# Altium PCB MKIPRIMARY 4L.PcbDoc
Units mm, origin at the board's own origin, x right, y up, seen from the top; angles counter-clockwise.
Board outline 61 x 34.4 mm, 4 copper layers (Top Layer, Int1, Int2, Bottom Layer), stack 1.586 mm thick; 3 components, 1 nets, 16 pads, 51 vias.
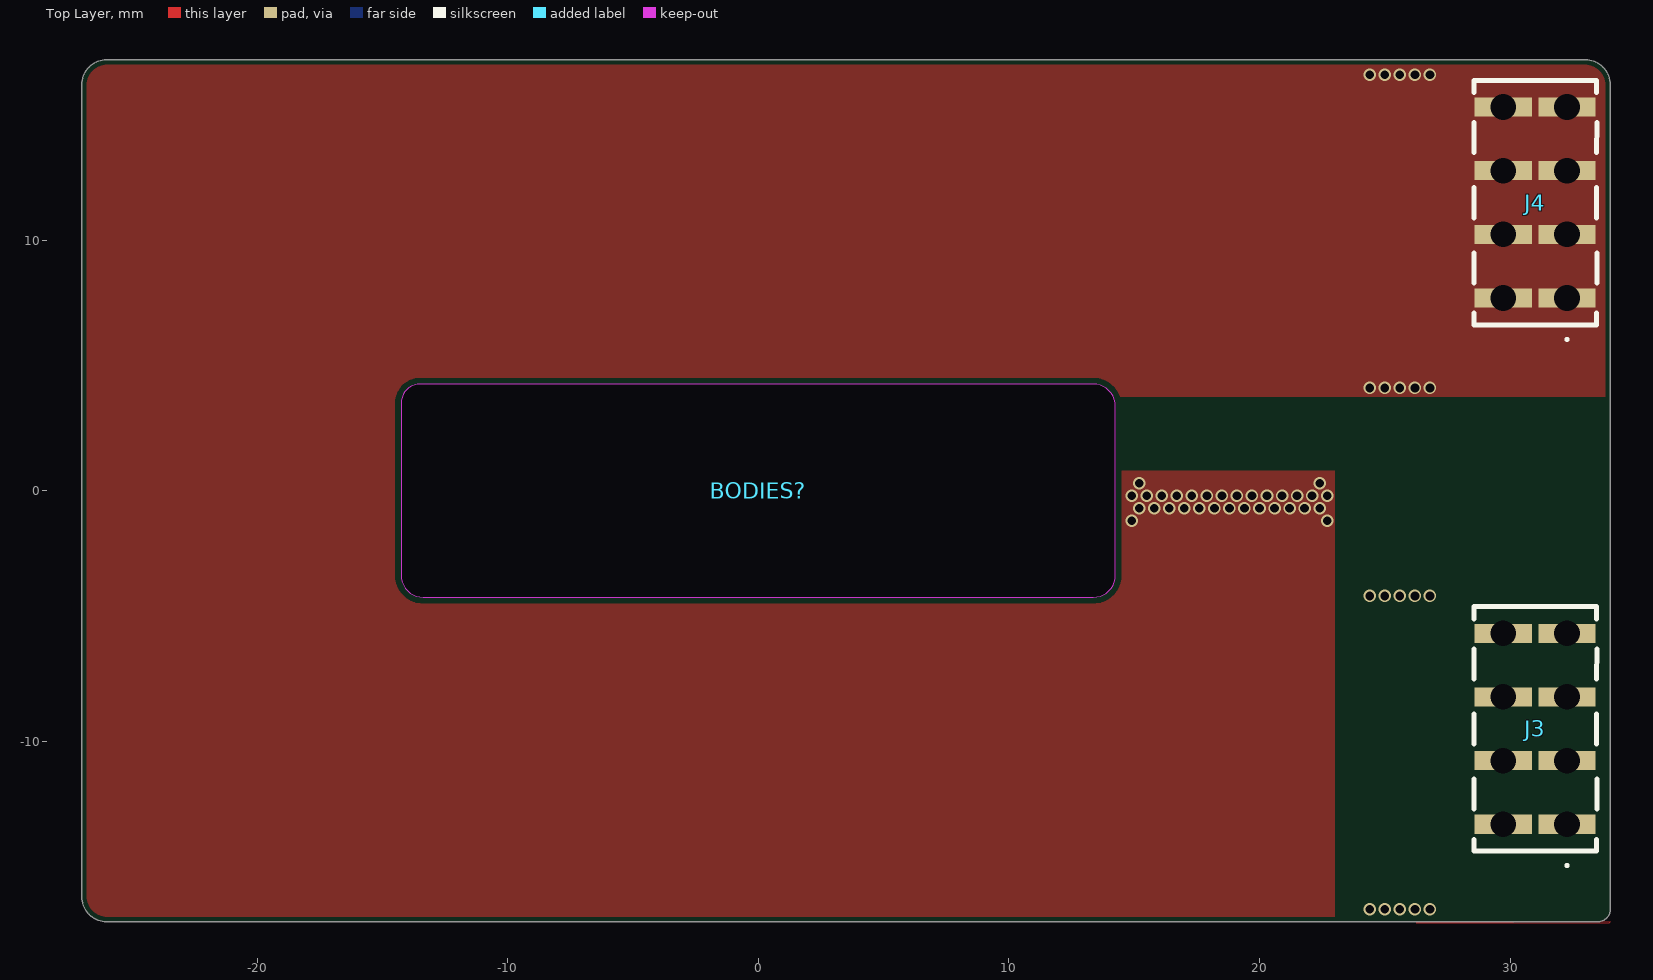
[diagram p0: Top Layer view]
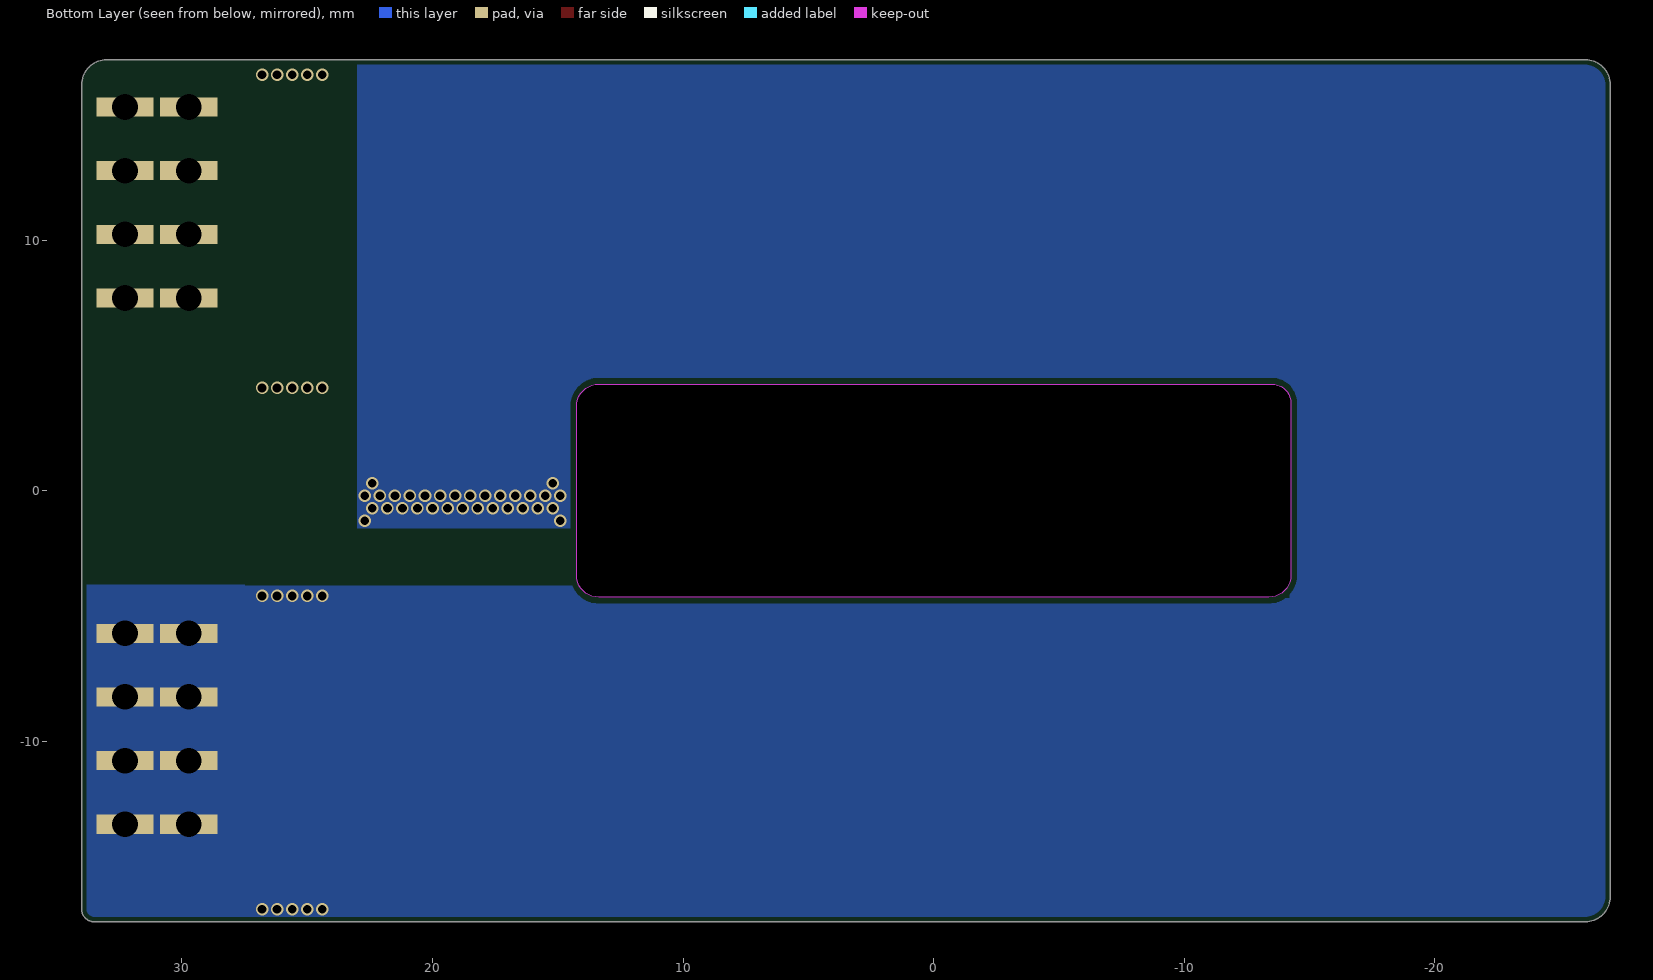
[diagram p1: Bottom Layer view, seen from below]
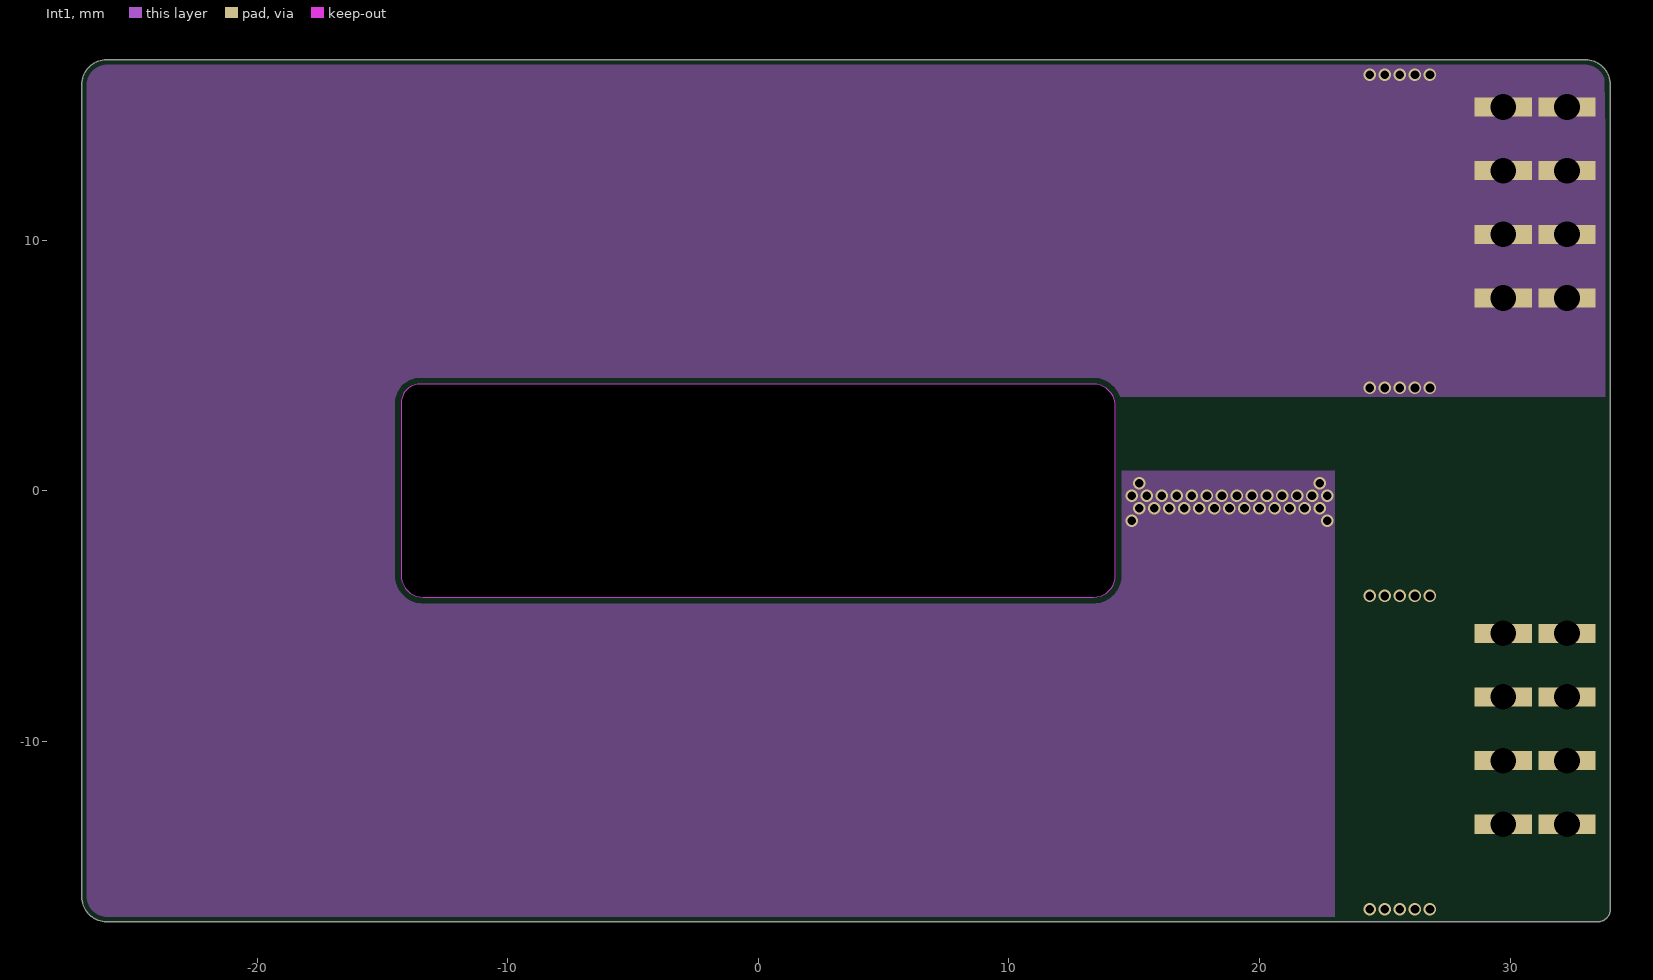
[diagram p2: Int1]
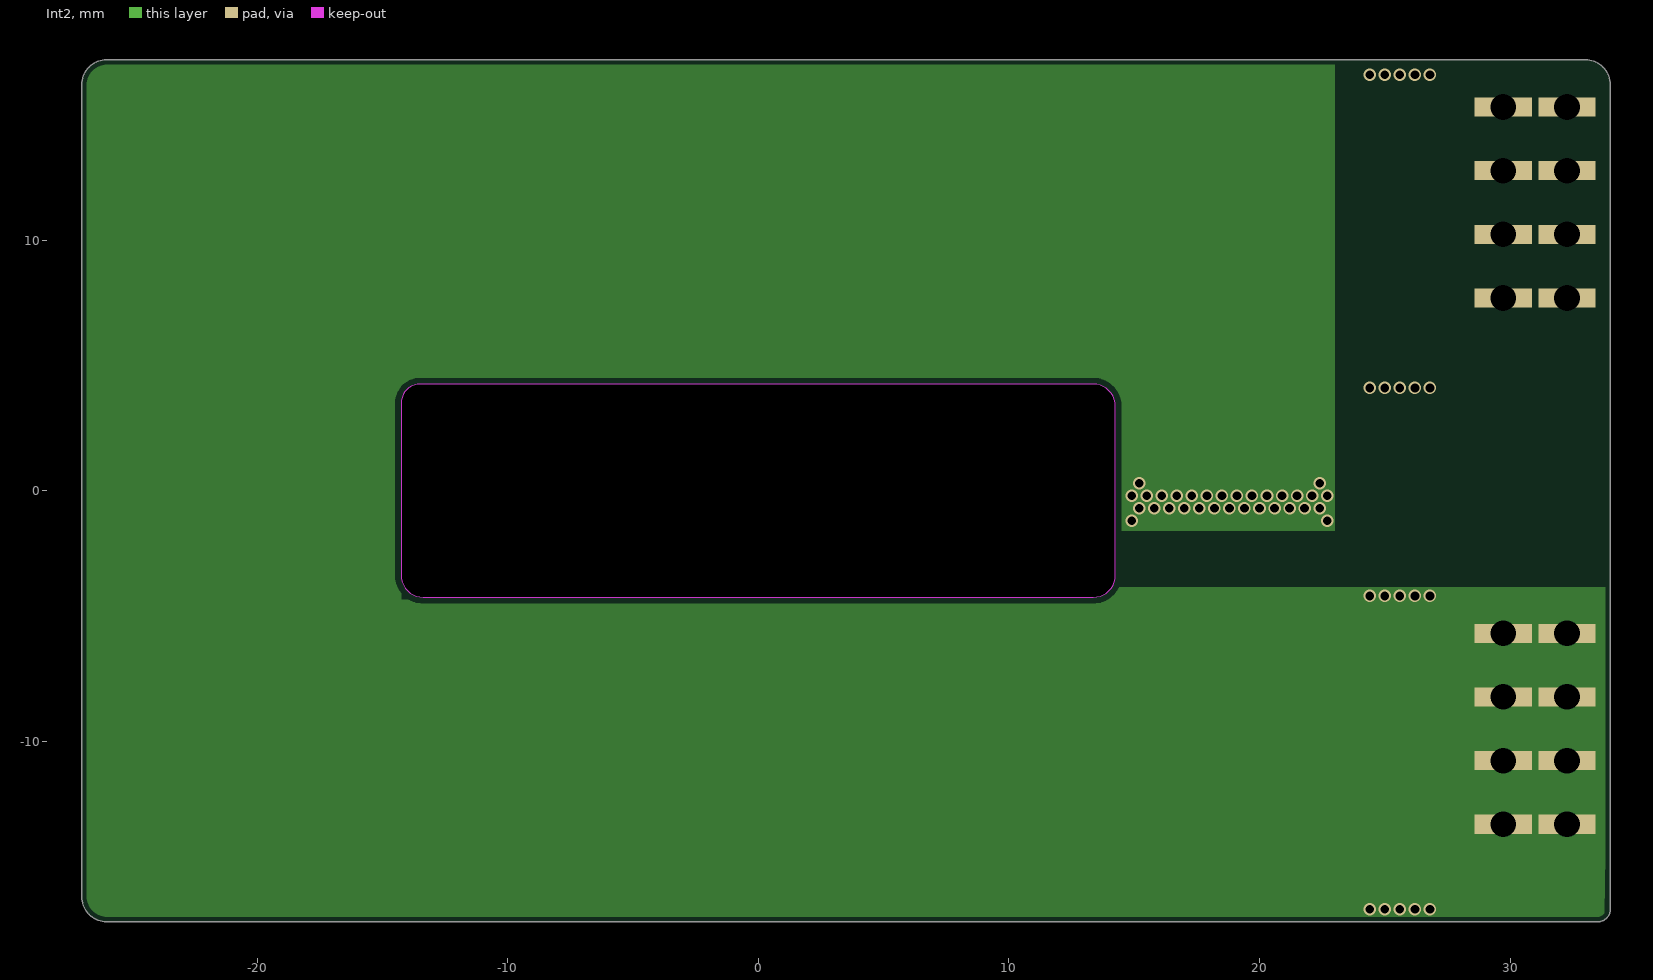
[diagram p3: Int2]

## Layer stack, top to bottom
Top Solder: solder mask 0.0254, SM-001, Dk 4
Top Layer: signal copper 0.035
Dielectric 2: prepreg 0.2104, PP-017, Dk 4.3
Int1: signal copper 0.0152
Dielectric 3: core 1.065, Core-039, Dk 4.8
Int2: signal copper 0.0152
Dielectric 4: prepreg 0.2104, PP-017, Dk 4.3
Bottom Layer: signal copper 0.035
Bottom Solder: solder mask 0.0254, SM-001, Dk 4

## Board outline
-26,-17.2 cw(c-26,-16.2) -27,-16.2 -27,16.2 cw(c-26,16.2) -26,17.2 33,17.2 cw(c33,16.2) 34,16.2 34,-16.7 cw(c33.5,-16.7) 33.5,-17.2
cut-out: 13.375,-4.25 ccw(c13.375,-3.375) 14.25,-3.375 14.25,3.375 ccw(c13.375,3.375) 13.375,4.25 -13.5,4.25 ccw(c-13.5,3.5) -14.25,3.5 -14.25,-3.375 ccw(c-13.375,-3.375) -13.375,-4.25

## Design rules (kind name [scope] priority, off if disabled: settings)
BoardOutlineClearance [All] p1: gap=0.2 ignorepadtopadclearanceinfootprint=FALSE
Clearance [All] p1: gap=0.2 ignorepadtopadclearanceinfootprint=FALSE except(0.09: Arc-Arc Arc-Track Track-Track; 0.1: SMDPad-Via; 0.127: SMDPad-SMDPad SMDPad-THPad; 0.15: Arc-Text Track-Text SMDPad-Text THPad-Text Via-Text Fill-Text Poly-Text Region-Text; 0.25: THPad-Via THPad-Fill THPad-Poly THPad-Region Fill-Fill Fill-Poly Fill-Region Fill-Hole Poly-Poly Poly-Region Poly-Hole Region-Region Region-Hole; 0.254: Arc-Via Arc-Hole Track-Via Track-Hole Via-Via; 0.5: THPad-THPad)
Creepage [All] p1: checkdistance=0.1
HoleSize [All] p1: absolutevalues=TRUE maxlimit=400 minlimit=0.15 maxpercent=80.000 minpercent=20.000
HoleToHoleClearance [All] p1: gap=0.5 allowstackedmicrovias=TRUE
MinimumAnnularRing MinimumAnnularRing_1 [All] p1: minimumring=0.254
MinimumSolderMaskSliver [All] p1: minsoldermaskwidth=0.05
PlaneClearance [All] p1: clearance=0.35
PolygonConnect POW [InNetClass('POW')] p1: connectstyle=Direct reliefconductorwidth=0.254 reliefentries=4 polygonreliefangle="90 Angle" airgapwidth=0.254
PolygonConnect Polygon_GND [InNet('GND')] p2: connectstyle=Direct reliefconductorwidth=0.5 reliefentries=4 polygonreliefangle="45 Angle" airgapwidth=0.25
PolygonConnect "General Polygons" [All] p3: connectstyle=Direct reliefconductorwidth=0.3 reliefentries=4 polygonreliefangle="90 Angle" airgapwidth=0.25
RoutingVias [All] p1: holewidth=0.45 width=0.4 viastyle="Through Hole" minholewidth=0.15 minwidth=0.25 maxholewidth=6.3 maxwidth=2
SilkToSolderMaskClearance SilkToSolderMaskClearance_1 [All] p1: minsilkscreentomaskgap=0.05 clearancetoexposedcopper=TRUE
SolderMaskExpansion SolderMaskExpansion_1 [All] p1: expansion=0.102 istentingtop=FALSE
UnRoutedNet [All] p1: checkbadconnections=TRUE
Width [All] p1: maxlimit=1 minlimit=0.09 preferedwidth=0.4 minimp=50.000000 maximp=50.000000 favimp=50.000000
24 further rules are at their usual default settings.

## Classes and differential pairs
component class Symbs: BODIES? J3

## Components (designator, comment, footprint, x,y, rotation, side; value= is the part's Value field where it differs from the comment)
BODIES? "ELP43 I CORE" B66291G0000X187 0,0 r90 top
J3 "5-146254-4" 51462544 31,-9.5 r90 top
J4 "5-146254-4" 51462544 31,11.5 r90 top (schematic designator J3)

## Footprints (in the part's own frame and the unit in brackets; to place one, negate y for a bottom-side part, rotate by r counter-clockwise, add the part's x,y. Pads: shape width x height; smd on the part's side, far side on the other; paste and mask are expansions set on the pad)
51462544 [mm]
  rect 0.76x2.29 hole 1.02: 1(-3.81,-1.27) 2(-3.81,1.27) 3(-1.27,-1.27) 4(-1.27,1.27) 5(1.27,-1.27) 6(1.27,1.27) 7(3.81,-1.27) 8(3.81,1.27)
  silkscreen extent -5.51,-2.47 4.87,2.44, body extent -4.88,-2.45 4.88,2.43, height 8.2
B66291G0000X187 [mm] "Bare N87 ELP43 E Core"
  body extent -21.6,-13.95 21.6,13.95, height 9.5

## Part data
BODIES?: "BODIES - ELP43 3D BODY CORE, I CORE"
J3 J4: "Connector", Manufacturer_Name="TE Connectivity", Mouser Part Number=571-5-146254-4, Datasheet Link=https://www.te.com/commerce/DocumentDelivery/DDEController?Action=srchrtrv&DocNm=1307819_AMPMODU&DocType=Data+Sheet&DocLang=English&PartCntxt=5-146254-4&DocFormat=pdf, Height=8.21mm, Manufacturer_Part_Number=5-146254-4, Mouser Price/Stock=https://www.mouser.co.uk/ProductDetail/TE-Connectivity/5-146254-4?qs=bwpFY26eRVegfj1X1pwXFA%3D%3D

## Via types
v1: diameter 0.5, hole 0.35, Top Layer to Bottom Layer, tented both sides, 51 vias

## Nets (pads, with @x,y where several pads share a name; then routed paths per layer and width w, separated by ;. In a path a pad name is that pad's centre, name@x,y a point inside that pad or via, vN(x,y) a via of type N, cw(c..) or ccw(c..) an arc to the next point about the centre after c; other vN are vias at no path point)
primary: J3.1 J3.2 J3.3 J3.4 J3.5 J3.6 J3.7 J3.8 J4.1 J4.2 J4.3 J4.4 J4.5 J4.6 J4.7 J4.8
  other v1: 24.4,-16.7 25,-16.7 25.6,-16.7 26.2,-16.7 26.8,-16.7 24.4,-4.2 25,-4.2 25.6,-4.2 26.2,-4.2 26.8,-4.2 14.9,-1.2 22.7,-1.2 15.2,-0.7 15.8,-0.7 16.4,-0.7 17,-0.7 17.6,-0.7 18.2,-0.7 18.8,-0.7 19.4,-0.7 20,-0.7 20.6,-0.7 21.2,-0.7 21.8,-0.7 22.4,-0.7 14.9,-0.2 15.5,-0.2 16.1,-0.2 16.7,-0.2 17.3,-0.2 17.9,-0.2 18.5,-0.2 19.1,-0.2 19.7,-0.2 20.3,-0.2 20.9,-0.2 21.5,-0.2 22.1,-0.2 22.7,-0.2 15.2,0.3 22.4,0.3 24.4,4.1 25,4.1 25.6,4.1 26.2,4.1 26.8,4.1 24.4,16.6 25,16.6 25.6,16.6 26.2,16.6 26.8,16.6

## Polygon pours and split planes (outlines as drawn)
primary on Bottom Layer "PRIMARY_L04_P006" (solid, pour order 6): 13.7,4.199 13.7,-1.5 23,-1.5 23,13.25 23,17.199 -29.899,17.199 -29.949,17.149 -29.949,-17.251 33.541,-17.251 33.796,-16.996 34.051,-3.801 12.7,-3.801 12.7,-4.301 -14.199,-4.301 -14.199,4.199
primary on Bottom Layer "PRIMARY_L04_P004" (solid, pour order 4): 24,-15 27.5,-11.5 27.5,-3.75 34,-3.75 34,-17.25 24,-17.25
primary on Top Layer "PRIMARY_L01_P005" (solid, pour order 5): 33.745,16.945 33.49,17.2 -29.95,17.2 -29.95,-17.25 23,-17.25 23,-13.25 23,0.8 12.8,0.8 12.8,-4.25 -12.8,-4.25 -12.8,4.25 12.8,4.25 12.8,3.75 28.75,3.75 34,3.75
primary on Top Layer "PRIMARY_L01_P003" (solid, pour order 3): 24,15 27.5,11.5 27.5,3.75 34,3.75 34,17.25 24,17.25
primary on Top Layer "PRIMARY_L01_P001" (solid, pour order 1): 26.25,-17.25 33.95,-17.25 34,-17.2
primary on Int2 "PRIMARY_L03_P008" (solid, pour order 8): 12.3,4.157 12.3,-1.6 23,-1.6 23,17.157 -29.947,17.157 -29.997,17.107 -29.997,-17.293 33.493,-17.293 33.748,-17.038 34.003,-3.843 10.7,-3.843 10.7,-4.343 -14.247,-4.343 -14.247,4.157
primary on Int1 "PRIMARY_L02_P007" (solid, pour order 7): 33.745,16.945 33.49,17.2 -30,17.2 -30,-17.2 -29.95,-17.25 23,-17.25 23,-13.25 23,0.8 12.7,0.8 12.7,-4.25 -13.6,-4.25 -13.6,4.25 12.5,4.25 12.5,3.75 28.75,3.75 34,3.75

## Silkscreen, mask and mechanical layers (free items; w line width, h text height)
Mechanical 15 (Mech15):
  the board outline again, w0.1